# Altium PCB project_buran_pcb.PcbDoc
Units mm, origin at the board's own origin, x right, y up, seen from the top; angles counter-clockwise.
Board outline 90 x 60 mm, 2 copper layers (Top Layer, Bottom Layer); 27 components, 41 nets, 174 pads, 0 vias.
Unrouted connection lines stored in the file: 94.
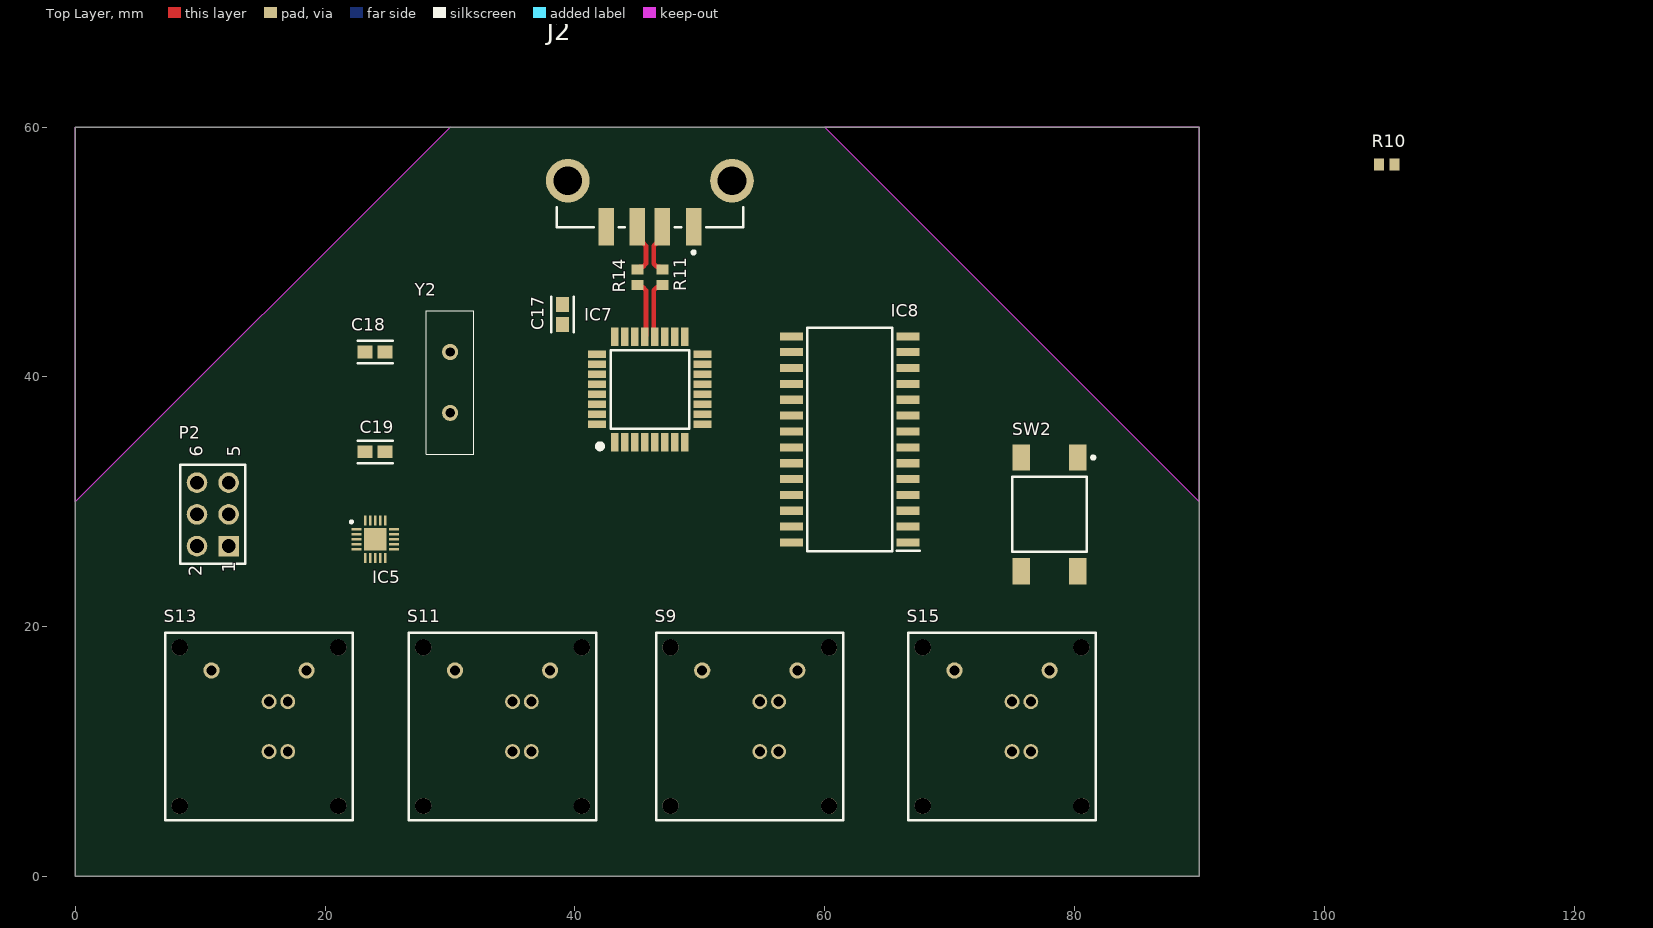
[diagram p0: Top Layer view]
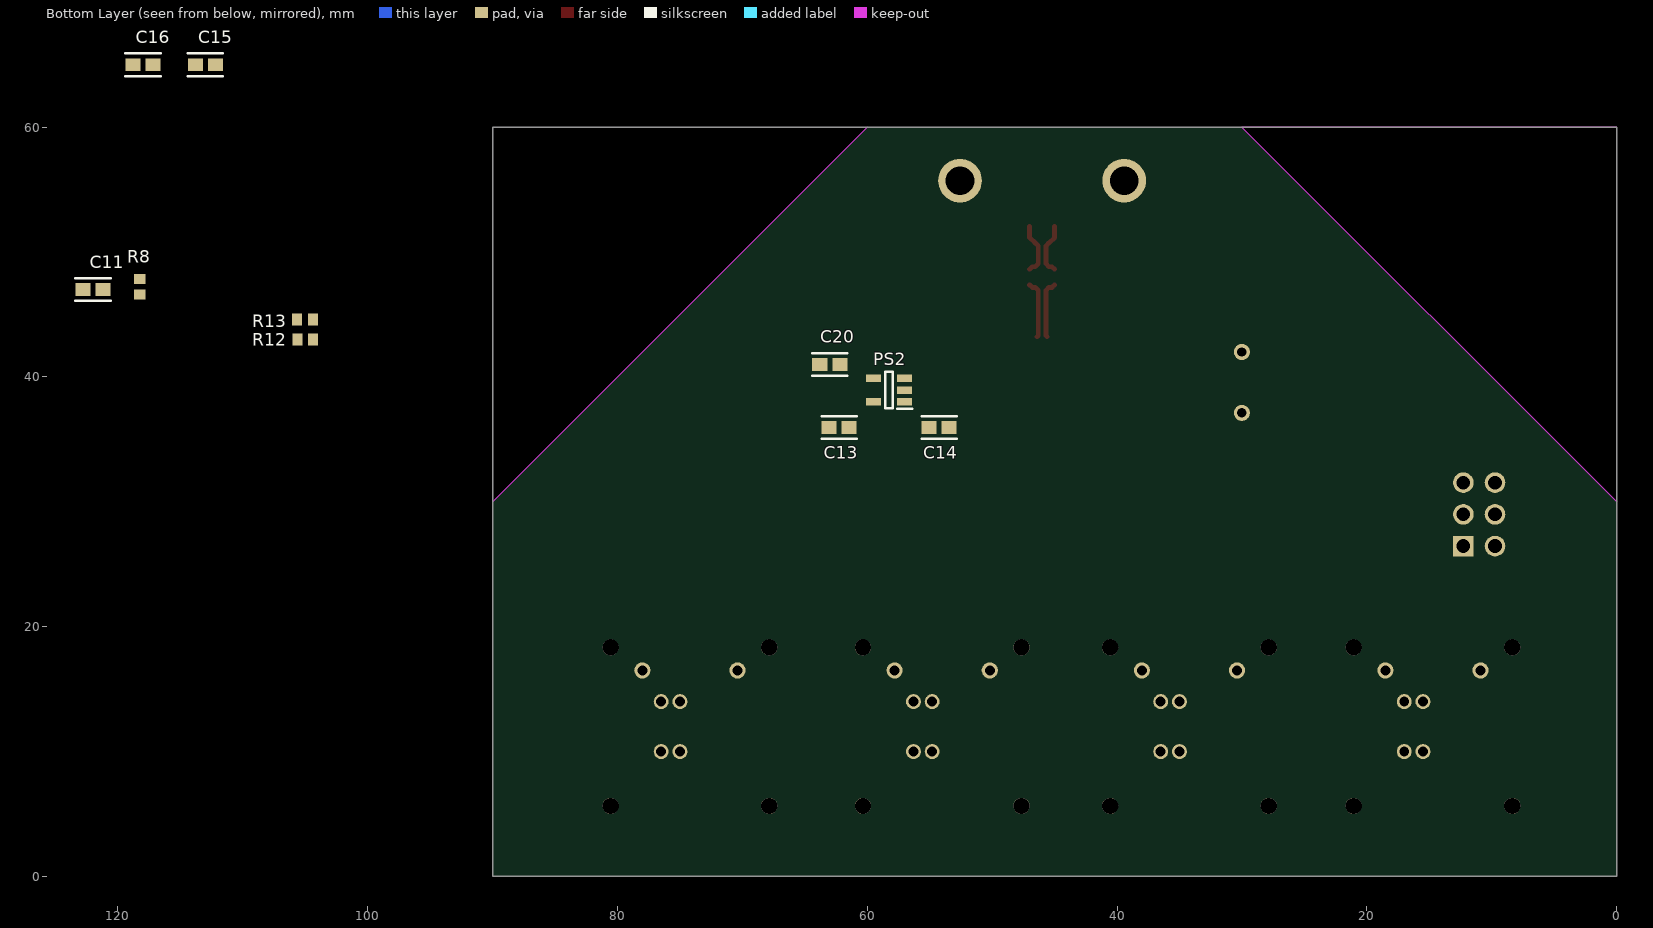
[diagram p1: Bottom Layer view, seen from below]

## Layer stack, top to bottom
Top Solder: solder mask 0.0102, Solder Resist, Dk 3.5
Top Layer: signal copper 0.0356
Dielectric 1: dielectric 0.32, FR-4, Dk 4.8
Bottom Layer: signal copper 0.0356
Bottom Solder: solder mask 0.0102, Solder Resist, Dk 3.5

## Board outline
0,0 90,0 90,60 0,60
cut-out: 90,60 60,60 90,30
cut-out: 0,60 30,60 0,30

## Design rules (kind name [scope] priority, off if disabled: settings)
Clearance [All] p1: gap=0.254 ignorepadtopadclearanceinfootprint=FALSE except(0: Arc-Hole Track-Hole SMDPad-Hole THPad-Hole Via-Hole Fill-Hole Poly-Hole Region-Hole Text-Hole; 0.127: SMDPad-SMDPad; 0.2: Arc-SMDPad Track-SMDPad)
DiffPairsRouting [All] p1: maxlimit=0.254 minlimit=0.254 mostfreqgap=0.254 toplayer_minwidth=0.381 toplayer_maxwidth=0.381 toplayer_prefwidth=0.381 bottomlayer_minwidth=0.381 bottomlayer_maxwidth=0.381 bottomlayer_prefwidth=0.381 maxuncoupledlength=12.7
MinimumSolderMaskSliver [All] p1: minsoldermaskwidth=0.09
PolygonConnect [All] p1: connectstyle=Relief reliefconductorwidth=0.254 reliefentries=4 polygonreliefangle="90 Angle" airgapwidth=0.254
RoutingVias [All] p1: holewidth=0.711 width=1.27 viastyle="Through Hole" minholewidth=0.711 minwidth=1.27 maxholewidth=0.711 maxwidth=1.27
SilkToSilkClearance [All] p1: silktosilkclearance=0.15
SilkToSolderMaskClearance [IsPad] p1: minsilkscreentomaskgap=0.15 clearancetoexposedcopper=TRUE
SolderMaskExpansion [All] p1: expansion=0.102 istentingtop=FALSE
Width [All] p1: maxlimit=0.254 minlimit=0.254 preferedwidth=0.254
26 further rules are at their usual default settings.

## Classes and differential pairs
differential pair D: +D_P -D_N

## Components (designator, comment, footprint, x,y, rotation, side; value= is the part's Value field where it differs from the comment)
C11 "GRM188R60J106ME47D" FP-GRM188-0_1-e0_2_0_55-IPC_A 122,47 r180 bottom
C13 "GRM188R60J106ME47D" FP-GRM188-0_1-e0_2_0_55-IPC_A 62.25,35.95 r180 bottom
C14 "GRM188R60J106ME47D" FP-GRM188-0_1-e0_2_0_55-IPC_A 54.25,35.95 r0 bottom
C15 "GRM188R60J106ME47D" FP-GRM188-0_1-e0_2_0_55-IPC_A 113,65 r180 bottom
C16 "GRM188R60J106ME47D" FP-GRM188-0_1-e0_2_0_55-IPC_A 118,65 r0 bottom
C17 "GRM188R60J106ME47D" FP-GRM188-0_1-e0_2_0_55-IPC_A 39,45 r90 top
C18 "GRM188R60J106ME47D" FP-GRM188-0_1-e0_2_0_55-IPC_A 24,42 r0 top
C19 "GRM188R60J106ME47D" FP-GRM188-0_1-e0_2_0_55-IPC_A 24,34 r180 top
C20 "GRM188R60J106ME47D" FP-GRM188-0_1-e0_2_0_55-IPC_A 63,41 r180 bottom
IC5 "LP5012RUKR" QFN40P300X300X80-21N-D 24,27 r0 top
IC7 "MAX3420EECJ+" QFP80P900X900X160-32N 46,39 r90 top
IC8 "AVR128DA28-I_SO" SOIC127P1030X265-28N 62,35 r180 top
J2 "292303-7" FP-292303-7-MFG 46,59 r270 top
P2 "61300621121" 61300621121 11,29 r90 top
PS2 "TLV75733PDBVR" SOT95P280X145-5N 58.25,38.95 r0 bottom
R8 "CRCW0603110RFKEA" RESC1609X50X30NL10T20 118.262,47.219 r90 bottom
R10 "CRCW0603110RFKEA" RESC1609X50X30NL10T20 105,57 r0 top
R11 "33R" RESC1609X50X30NL10T20 47,48 r270 top
R12 "CRCW0603110RFKEA" RESC1609X50X30NL10T20 105,43 r0 bottom
R13 "CRCW0603110RFKEA" RESC1609X50X30NL10T20 105.025,44.588 r0 bottom
R14 "33R" RESC1609X50X30NL10T20 45,48 r270 top
S9 "465M111172501" 465M111172501 54,12 r0 top
S11 "465M111172501" 465M111172501 34.2,12 r0 top
S13 "465M111172501" 465M111172501 14.7,12 r0 top
S15 "465M111172501" 465M111172501 74.2,12 r0 top
SW2 "FSM4JSMA" TECO-FSM4JSMA_V 78,29 r0 top
Y2 "9B-12.000MAAJ-B" 9B12000MAAJB 30,37.12 r90 top

## Footprints (in the part's own frame and the unit in brackets; to place one, negate y for a bottom-side part, rotate by r counter-clockwise, add the part's x,y. Pads: shape width x height; smd on the part's side, far side on the other; paste and mask are expansions set on the pad)
9B12000MAAJB [mm]
  round 1.294 hole 0.755: 1(0,0) 2(4.88,0)
  silkscreen extent -3.31,-1.9 8.19,1.9, body extent -3.31,-1.9 8.19,1.9, height 3.78
465M111172501 [mm] "15x15mm THT Push Button Switch with integrated LED RGB"
  round 1.3 hole 0.8: 1(-3.81,4.5) 2(3.81,4.5)
  round 1.2 hole 0.8: L1(0.8,-2) L2(2.3,-2) L3(2.3,2) LC(0.8,2)
  round 1.3 hole 1.3 unplated: MH1(-6.35,-6.35) MH2(-6.35,6.35) MH3(6.35,6.35) MH4(6.35,-6.35)
  silkscreen extent -7.5,-7.5 7.5,7.5, body extent -7.5,-7.5 7.5,7.5, height 19.55
61300621121 [mm] "Pin Header, pitch 2.54 mm, THT, Vertical, dual row, 6p"
  rect 1.65x1.65 hole 1.1: 1(-2.54,-1.27)
  round 1.65 hole 1.1: 2(-2.54,1.27) 3(0,-1.27) 4(0,1.27) 5(2.54,-1.27) 6(2.54,1.27)
  silkscreen extent -3.96,-2.62 3.96,2.62, body extent -3.81,-2.54 3.81,2.54, height 8.59
FP-292303-7-MFG [mm]
  rect 3x1.25 smd paste+0 mask+0: 1(6.96,3.5) 2(6.96,1) 3(6.96,-1) 4(6.96,-3.5)
  round 3.5 hole 2.3 paste-1000 mask+0: 5(3.28,6.57) 6(3.28,-6.57)
  silkscreen extent 5.4,-7.47 9.15,7.47, body extent -7.1,-8.42 8.56,8.42, height 0.25
FP-GRM188-0_1-e0_2_0_55-IPC_A [mm]
  rect 1.208x1.012 smd paste+0 mask+0: 1(-0.802,0) 2(0.802,0)
  silkscreen extent -1.41,-0.91 1.41,0.91, body extent -0.8,-0.4 0.8,0.4, height 0.9
QFN40P300X300X80-21N-D [mm]
  rect 0.8x0.2 smd: 1(-1.5,0.8) 2(-1.5,0.4) 3(-1.5,0) 4(-1.5,-0.4) 5(-1.5,-0.8) 11(1.5,-0.8) 12(1.5,-0.4) 13(1.5,0) 14(1.5,0.4) 15(1.5,0.8)
  rect 0.2x0.8 smd: 6(-0.8,-1.5) 7(-0.4,-1.5) 8(0,-1.5) 9(0.4,-1.5) 10(0.8,-1.5) 16(0.8,1.5) 17(0.4,1.5) 18(0,1.5) 19(-0.4,1.5) 20(-0.8,1.5)
  rect 1.8x1.8 smd: 21(0,0)
  silkscreen extent -2,1.3 -1.8,1.5, body extent -1.55,-1.55 1.55,1.55, height 0.8
QFP80P900X900X160-32N [mm]
  rect 1.45x0.6 smd: 1(-4.225,2.8) 2(-4.225,2) 3(-4.225,1.2) 4(-4.225,0.4) 5(-4.225,-0.4) 6(-4.225,-1.2) 7(-4.225,-2) 8(-4.225,-2.8) 17(4.225,-2.8) 18(4.225,-2) 19(4.225,-1.2) 20(4.225,-0.4) 21(4.225,0.4) 22(4.225,1.2) 23(4.225,2) 24(4.225,2.8)
  rect 0.6x1.45 smd: 9(-2.8,-4.225) 10(-2,-4.225) 11(-1.2,-4.225) 12(-0.4,-4.225) 13(0.4,-4.225) 14(1.2,-4.225) 15(2,-4.225) 16(2.8,-4.225) 25(2.8,4.225) 26(2,4.225) 27(1.2,4.225) 28(0.4,4.225) 29(-0.4,4.225) 30(-1.2,4.225) 31(-2,4.225) 32(-2.8,4.225)
  silkscreen extent -4.75,-3.15 3.15,4.2, body extent -4.5,-4.5 4.5,4.5, height 1.6
RESC1609X50X30NL10T20 [mm] "Chip Resistor, 2-Leads, Body 1.55x0.85mm, IPC Medium Density"
  rect 0.8x0.95 smd: 1(-0.625,0) 2(0.625,0)
  body extent -0.82,-0.48 0.82,0.48, height 0.5
SOIC127P1030X265-28N [mm]
  rect 1.85x0.65 smd: 1(-4.675,8.255) 2(-4.675,6.985) 3(-4.675,5.715) 4(-4.675,4.445) 5(-4.675,3.175) 6(-4.675,1.905) 7(-4.675,0.635) 8(-4.675,-0.635) 9(-4.675,-1.905) 10(-4.675,-3.175) 11(-4.675,-4.445) 12(-4.675,-5.715) 13(-4.675,-6.985) 14(-4.675,-8.255) 15(4.675,-8.255) 16(4.675,-6.985) 17(4.675,-5.715) 18(4.675,-4.445) 19(4.675,-3.175) 20(4.675,-1.905) 21(4.675,-0.635) 22(4.675,0.635) 23(4.675,1.905) 24(4.675,3.175) 25(4.675,4.445) 26(4.675,5.715) 27(4.675,6.985) 28(4.675,8.255)
  silkscreen extent -5.6,-8.95 3.4,8.95, body extent -5.15,-8.95 5.15,8.95, height 2.65
SOT95P280X145-5N [mm]
  rect 1.2x0.6 smd: 1(-1.25,0.95) 2(-1.25,0) 3(-1.25,-0.95) 4(1.25,-0.95) 5(1.25,0.95)
  silkscreen extent -1.85,-1.45 0.3,1.5, body extent -1.4,-1.45 1.4,1.45, height 1.45
TECO-FSM4JSMA_V [mm] "SMD, 4-Leads, Body 6x6mm, Pitch 4.5mm"
  rect 1.4x2.1 smd: 1(2.25,4.55) 2(2.25,-4.55) 3(-2.25,4.55) 4(-2.25,-4.55)
  silkscreen extent -3,-3 3.63,4.67, body extent -3,-5 3,5, height 5.08

## Part data
C11 C13 C14 C15 C16 C17 C18 C19 C20: library part CMP-2006-02792-2, "Chip Multilayer Ceramic Capacitors for General Purpose, 0603, 10uF, X5R, 15%, 20%, 6.3V", Capacitance=10uF, Case Code (Imperial)=0603, Case Code (Metric)=1608, Dielectric=X5R, Max Operating Temperature=85°C, Min Operating Temperature=-55°C, Package Quantity=4000, Tolerance=20%, Voltage=6.3V, Case/Package=0603, Depth=0.8mm, Height=0.8mm, Lead Free="Lead Free", Length=1.6mm, Material=Ceramic, Mount="Surface Mount", Packaging="Tape and Reel", Radiation Hardening=No, REACH SVHC="No SVHC", Termination=SMD/SMT, Thickness=0.035inch, Voltage Rating=6.3V, Voltage Rating (DC)=6.3V, Width=0.031inch
IC5: "Integrated Circuit", Manufacturer_Name="Texas Instruments", Mouser Part Number=595-LP5012RUKR, Arrow Part Number=LP5012RUKR, Arrow Price/Stock=https://www.arrow.com/en/products/lp5012rukr/texas-instruments, Datasheet Link=http://www.ti.com/lit/gpn/LP5012, Height=0.8mm, Manufacturer_Part_Number=LP5012RUKR, Mouser Price/Stock=https://www.mouser.co.uk/ProductDetail/Texas-Instruments/LP5012RUKR/?qs=mAH9sUMRCts7Z0PlkfxWfA%3D%3D
IC7: "Integrated Circuit", Manufacturer_Name="Maxim Integrated", Mouser Part Number=700-MAX3420EECJ, Datasheet Link=https://pdfserv.maximintegrated.com/en/ds/MAX3420E.pdf, Height=1.6mm, Manufacturer_Part_Number=MAX3420EECJ+, Mouser Price/Stock=https://www.mouser.co.uk/ProductDetail/Maxim-Integrated/MAX3420EECJ%2b/?qs=1THa7WoU59F45gydMDQ7mg%3D%3D
IC8: "Integrated Circuit", Arrow Part Number=AVR128DA28-I/SO, Manufacturer_Name=Microchip, Mouser Part Number=579-AVR128DA28-I/SO, Arrow Price/Stock=https://www.arrow.com/en/products/avr128da28-iso/microchip-technology, Datasheet Link=https://componentsearchengine.com/Datasheets/2/AVR128DA28-I_SO.pdf, Height=2.65mm, Manufacturer_Part_Number=AVR128DA28-I/SO, Mouser Price/Stock=https://www.mouser.co.uk/ProductDetail/Microchip-Technology/AVR128DA28-I-SO?qs=xZ%2FP%252Ba9zWqZ3NQP19LtSGg%3D%3D
J2: library part CMP-03360-000008-1, "CONN RCPT USB2.0 TYPEA 4P SMD RA", Current Rating=1A, Manufacturer="TE Connectivity", Temperature="-55°C to +85°C", Temperature Range High=+85°C, Temperature Range Low=-55°C, Voltage Rating=30V, Automotive=No, Category=Conn, ComponentLink2Description=Datasheet, ComponentLink2URL=https://www.te.com/usa-en/product-292303-7.html?te_bu=Cor&te_type=other&te_campaign=oct_glo_cor-oct-global-oth-prtnr-fy19-oct-octo-buy-bom_sma-298_2&elqCampaignId=35216, Conn Orientation="Right Angle", Contact Material=Gold,Nickel, Device Class L1=Connectors, Device Class L2="USB Connectors", Device Class L3=unset, Digikey Description="CONN RCPT USB2.0 TYPEA 4P SMD RA", Is Female=yes, Lead Free=Yes, Manufacturer Part Number=292303-7, Mouser Description="USB Connectors USB A R/A Recpt Assy SMT", Number Of Contacts=4, Octopart=https://octopart.com/292303-7-te+connectivity-42840369, Package=292303-7, RoHS=TRUE, Shielding=true, Usb Standard="USB 2.0"
P2: library part CMP-1502-01072-1, "THT Vertical Pin Header WR-PHD, Pitch 2.54 mm, Dual Row, 6 pins", Contact Resistance=20mOhm, Manufacturer="Wurth Elektronik", Operating Temperature=-40to105degC, Rated Current=3A, Withstanding Voltage=500VAC, Working Voltage=250VAC, Datasheet URL=https://katalog.we-online.de/em/datasheet/6130xx21121.pdf, Gender=Male, Manufacturer URL=http://www.we-online.de, Mounting Technology=THT, Orientation=Vertical, Package Reference=61300621121, Packaging=Bag, Part Number=61300621121, Pin Number=6, Pitch=2.54mm, Publisher=WurthElektronik, Row Number=Dual
PS2: "Power Supply", Manufacturer_Name="Texas Instruments", Mouser Part Number=595-TLV75733PDBVR, Arrow Part Number=TLV75733PDBVR, Arrow Price/Stock=https://www.arrow.com/en/products/tlv75733pdbvr/texas-instruments, Datasheet Link=http://www.ti.com/lit/gpn/tlv757p, Height=1.45mm, Manufacturer_Part_Number=TLV75733PDBVR, Mouser Price/Stock=https://www.mouser.co.uk/ProductDetail/Texas-Instruments/TLV75733PDBVR/?qs=y6ZabgHbY%252BwAAzSntTW34w%3D%3D
R8 R10 R12 R13: library part CMP-2000-03854-1, Manufacturer="Vishay Dale", Part Number=CRCW0603110RFKEA
R11 R14: library part CMP-2000-03854-1, Manufacturer="Vishay Dale", Part Number=CRCW0603110RFKEA
S9 S11 S13 S15: "WS-PBTL Illuminated THT Push Button Switch, Red & Green & Blue", Emitting Color="Red & Green & Blue", Operating Temperature="-40 to +85degC", Rated Current=100mA, Rated Voltage=12VDC, ComponentLink1Description=Manufacturer, ComponentLink1URL=http://www.we-online.de, ComponentLink2Description=Datasheet, ComponentLink2URL=https://katalog.we-online.com/em/datasheet/465M111172501.pdf, Contact Material="Copper Alloy", Contact Plating=Gold, Mounting Technology=THT, Operation Force=200gf, Packaging="ESD Tray", Part Number=465M111172501, Published Date="September 2019", Publisher="Wurth Elektronik", Size=15x15mm, Terminal Material="Copper Alloy", Terminal Plating=Tin
SW2: library part CMP-2000-05602-2, "Swicth, SPST, 24 V, -35 to 85 degC, 4-Pin SMD, RoHS, Tape and Reel", Case\/Package=SMD/SMT, Contact Current Rating=50mA, Contact Resistance=100mOhm, Manufacturer="TE Connectivity", Max Operating Temperature=85degC, Max Voltage Rating (DC)=12V, Min Operating Temperature=-35degC, Operating Force=1.57N, Package Description="4-Pin Surface Mount Device, Body 6 x 6 mm, Pitch 4.5 mm", Package Quantity=750, Voltage Rating=24V, Actuator Length=0.055inch, Actuator Material=Polyamide, Contact Material=CopperAlloy, Contact Plating=Silver, Current Rating=50mA, Datasheet URL=http://www.te.com/commerce/DocumentDelivery/DDEController?Action=showdoc&DocId=Customer+Drawing%7F2-1437565-7%7FV%7Fpdf%7FEnglish%7FENG_CD_2-1437565-7_V.pdf%7F4-1437565-2, Datasheet Version="Rev. V, 02/2015", Electrical Life=100000Cycles, Illumination Type=Illuminated, Length=6mm, Manufacturer URL=http://www.te.com/, Mechanical Life=100000Cycles, Mount=SurfaceMount, Mounting Technology=SurfaceMount, Orientation=Straight, Package Reference=FSM4JSMA, Packaging=LoosePiece, REACH SVHC=Unknown, RoHSCompliant=true, Switch Travel=0.25mm, Termination=GullWing, Throw Configuration=SPST, Voltage Rating (DC)=24V, Width=6mm
Y2: "Crystal or Oscillator", Manufacturer_Name=TXC, Mouser Part Number=717-9B-12.000MAAJ-B, Datasheet Link=https://componentsearchengine.com/Datasheets/2/9B-12.000MAAJ-B.pdf, Height=3.68mm, Manufacturer_Part_Number=9B-12.000MAAJ-B, Mouser Price/Stock=https://www.mouser.co.uk/ProductDetail/TXC-Corporation/9B-12000MAAJ-B?qs=65dIHZNch5trLKZkRFdipQ%3D%3D

## Nets (pads, with @x,y where several pads share a name; then routed paths per layer and width w, separated by ;. In a path a pad name is that pad's centre, name@x,y a point inside that pad or via, vN(x,y) a via of type N, cw(c..) or ccw(c..) an arc to the next point about the centre after c; other vN are vias at no path point)
/RESET: IC7.10 IC8.18 SW2.1
/SS: IC7.12 IC8.1
D_N: IC7.20 J2.2 R11.1 R11.2 | length 8.8
  Top Layer w0.381: IC7.20 46.317,43.308 46.317,46.942 46.541,47.166 46.79,47.166 R11.2 ; R11.1 46.79,48.835 46.541,48.835 46.317,49.058 46.317,50.507 46.541,50.731 46.565,50.731 47,51.165 J2.2
D_P: IC7.21 J2.3 R14.1 R14.2 | length 8.8
  Top Layer w0.381: R14.2 45.21,47.166 45.459,47.166 45.682,46.942 45.682,43.308 IC7.21 ; R14.1 45.21,48.835 45.459,48.835 45.682,49.058 45.682,50.507 45.459,50.731 45.434,50.731 45,51.165 J2.3
GND: C11.2 C13.2 C14.2 C15.2 C16.2 C17.2 C18.2 C19.2 C20.2 IC5.14 IC5.15 IC5.21 IC7.5 IC7.6 IC7.18 IC7.19 IC8.15 IC8.21 J2.4 J2.5 J2.6 P2.6 PS2.2 R8.1 S9.2 S11.2 S13.2 S15.2 SW2.3 SW2.4
GPOUT0: IC7.1 IC8.16
GPOUT1: IC7.2 IC8.17
GPOUT2: IC7.7 IC8.22
GPOUT3: IC7.8 IC8.23
MISO: IC7.13 IC8.27
MOSI: IC7.14 IC8.26
NetC11_1: C11.1 IC5.1
NetC17_1: C17.1 IC7.24
NetC18_1: C18.1 IC7.26 Y2.2
NetC19_1: C19.1 IC7.27 Y2.1
NetIC5_20: IC5.20 R8.2
NetR10_1: R10.1 SW2.2
OUT0: IC5.2 S9.L1
OUT1: IC5.3 S9.L2
OUT2: IC5.4 S9.L3
OUT3: IC5.5 S11.L1
OUT4: IC5.6 S11.L2
OUT5: IC5.7 S11.L3
OUT6: IC5.8 S13.L1
OUT7: IC5.9 S13.L2
OUT8: IC5.10 S13.L3
OUT9: IC5.11 S15.L1
OUT10: IC5.12 S15.L2
OUT11: IC5.13 S15.L3
PD4: IC7.17 IC8.10
PD5: IC7.15 IC8.11
SCK: IC7.11 IC8.28
SCL: IC5.18 IC8.25 R12.1
SDA: IC5.17 IC8.24 R13.1
SW0: IC8.2 S9.1
SW1: IC8.3 S11.1
SW2: IC8.4 S13.1
SW3: IC8.5 S15.1
UPDI: IC8.19 P2.1
V_UNREG: C13.1 J2.1 PS2.1 PS2.3
VCC: C14.1 C15.1 C16.1 C20.1 IC5.16 IC5.19 IC7.3 IC7.4 IC7.22 IC7.23 IC8.14 IC8.20 P2.2 PS2.5 R10.2 R12.2 R13.2 S9.LC S11.LC S15.LC
pads on no net: IC7.9 IC7.16 IC7.25 IC7.28 IC7.29 IC7.30 IC7.31 IC7.32 IC8.6 IC8.7 IC8.8 IC8.9 IC8.12 IC8.13 P2.3 P2.4 P2.5 PS2.4 S9.MH1 S9.MH2 S9.MH3 S9.MH4 S11.MH1 S11.MH2 S11.MH3 S11.MH4 S13.LC S13.MH1 S13.MH2 S13.MH3 S13.MH4 S15.MH1 S15.MH2 S15.MH3 S15.MH4

## Text inside footprints (layer, text, board x,y; h text height)
P2: Top Overlay "6" at 10.193,33.614 h1.02 r90; Top Overlay "5" at 13.193,33.614 h1.02 r90; Top Overlay "2" at 10.1,24.03 h1.02 r90; Top Overlay "1" at 12.8,24.33 h1.02 r90